# Altium PCB LPCB218R0.PcbDoc (part 2 of 3)
Units mm, origin at the board's own origin, x right, y up, seen from the top; angles counter-clockwise.
Board outline 259.35 x 183.7 mm, 4 copper layers (Top Layer, Internal Plane 1, Mid-Layer 1, Bottom Layer); 193 components, 208 nets, 896 pads, 205 vias.
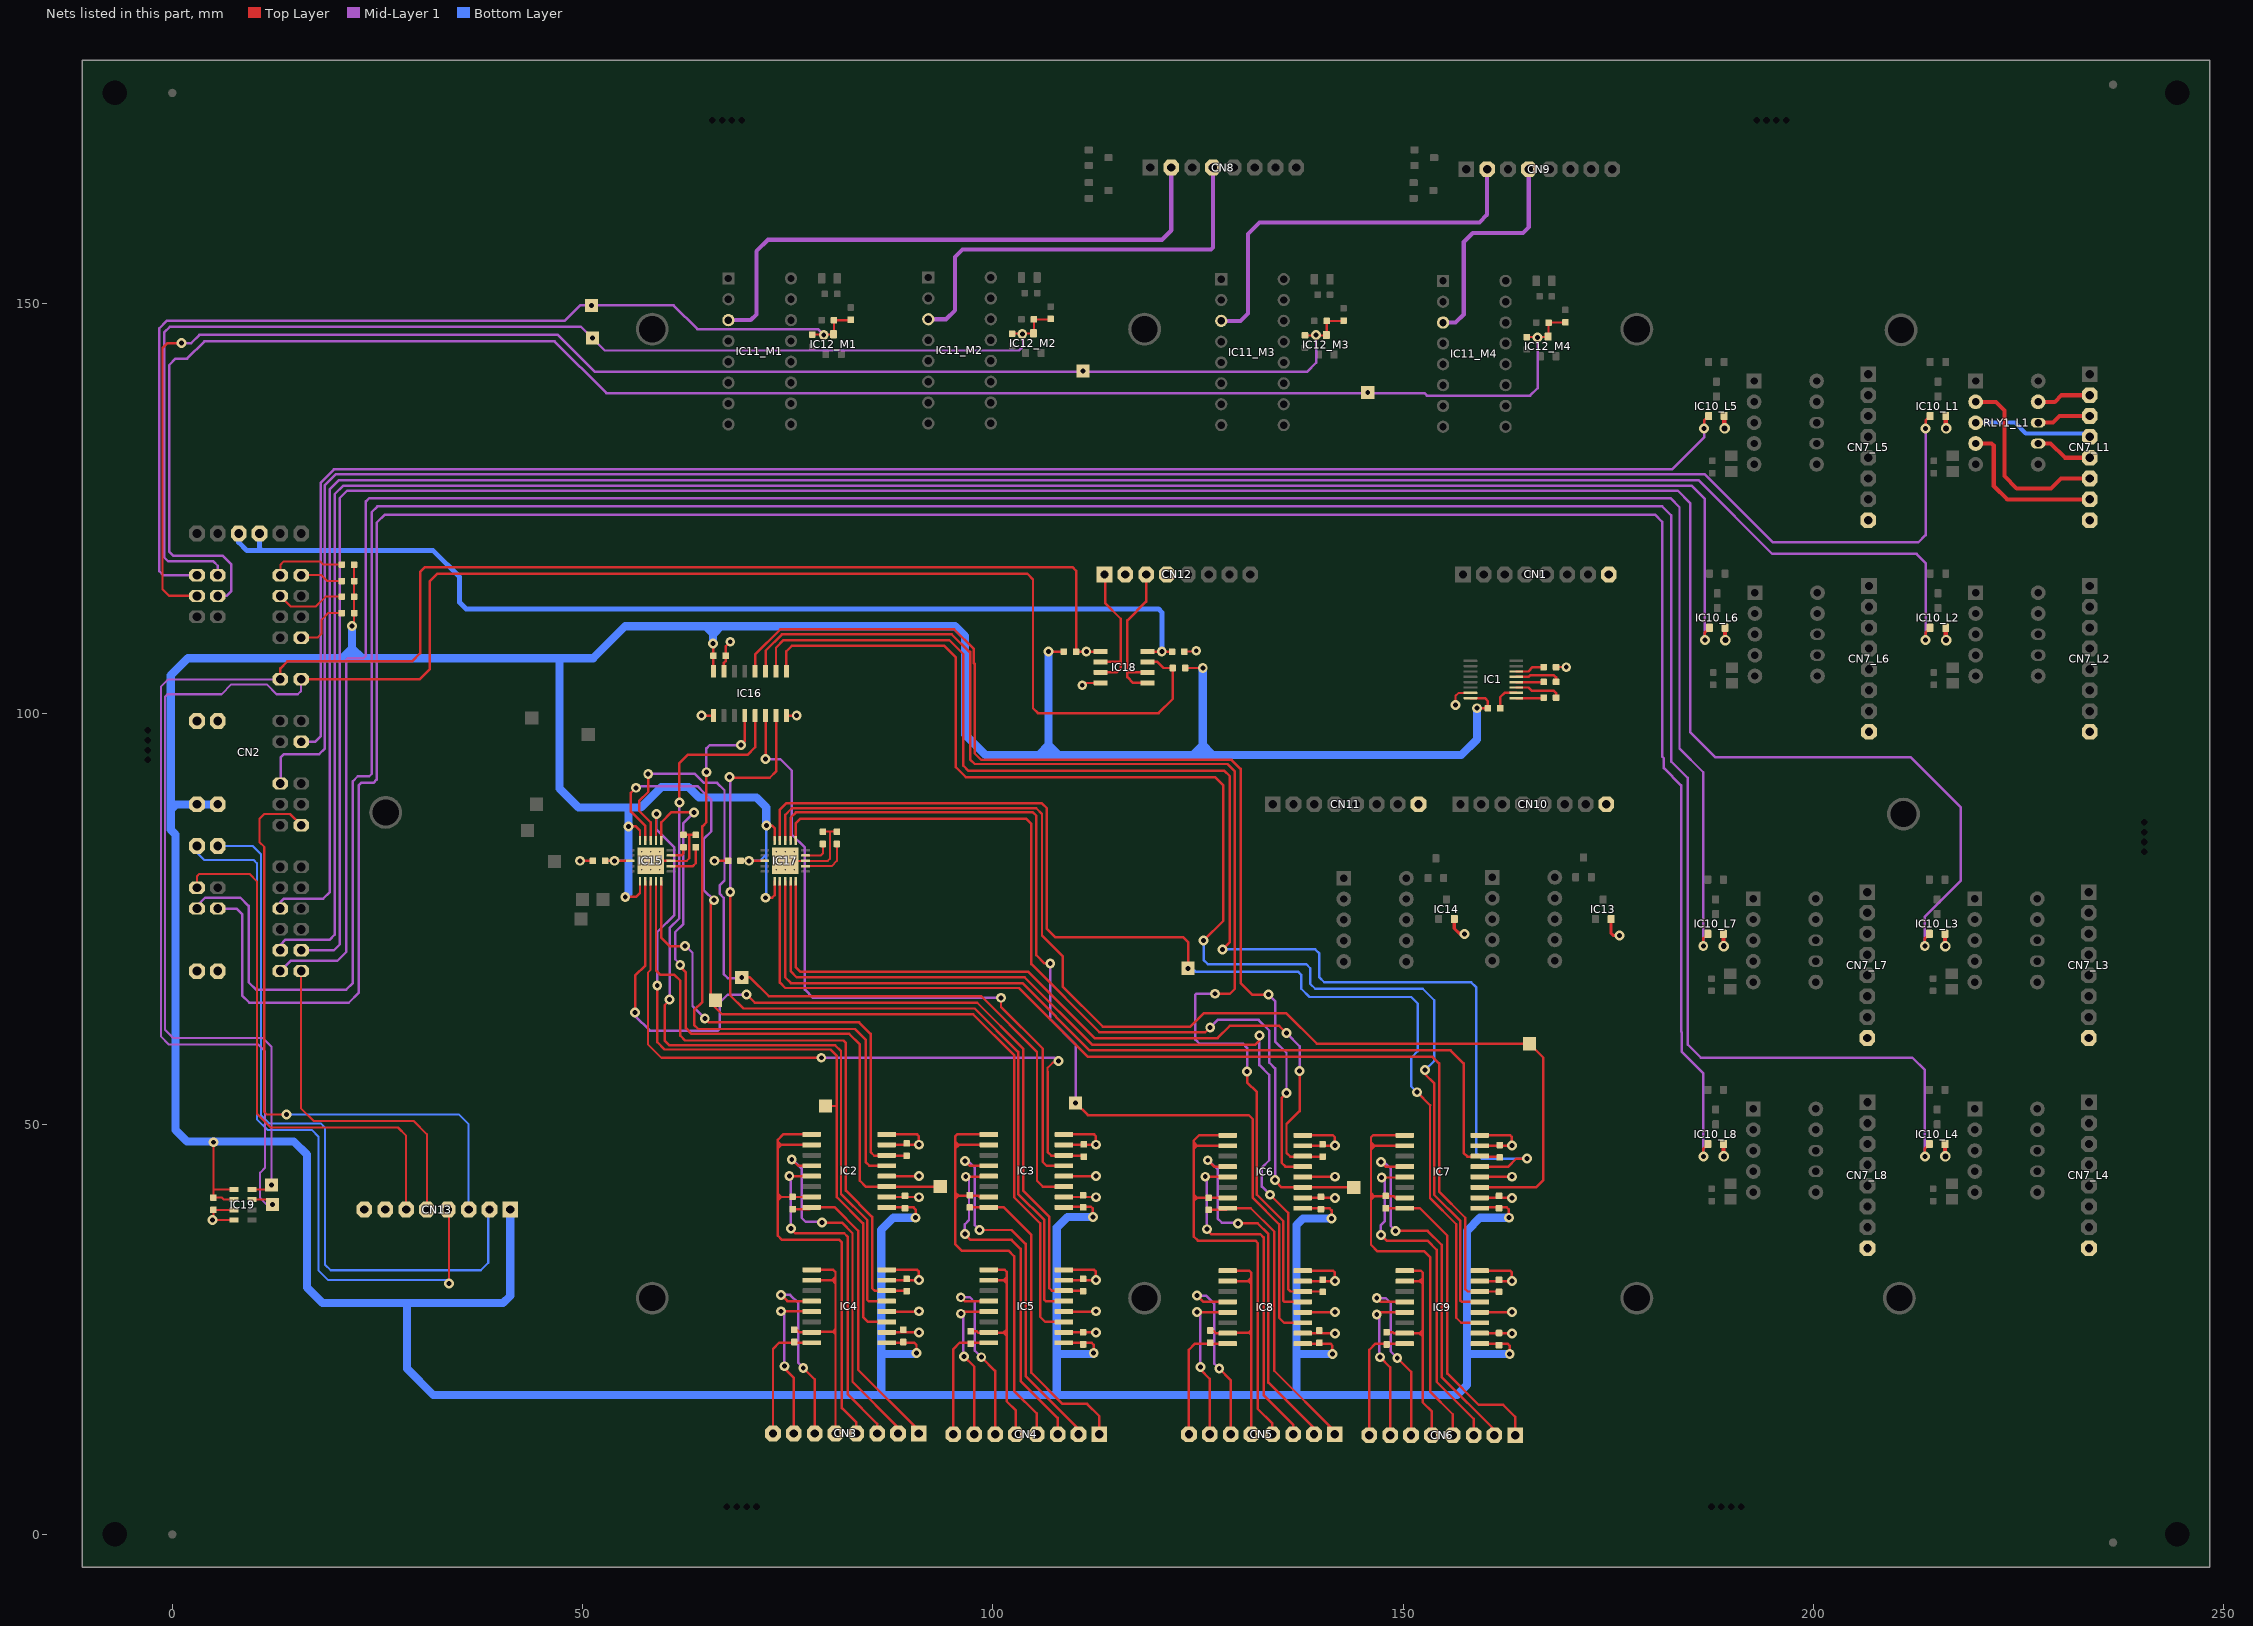
[diagram p4: the nets of this part, all layers, seen from the top]

## Via types
v1: diameter 1.2, hole 0.6, Top Layer to Bottom Layer, 181 vias
v2: diameter 0.5, hole 0.2, Top Layer to Bottom Layer, tented both sides, 16 vias
v3: diameter 1.27, hole 0.711, Top Layer to Bottom Layer, 8 vias

## Nets (pads, with @x,y where several pads share a name; then routed paths per layer and width w, separated by ;. In a path a pad name is that pad's centre, name@x,y a point inside that pad or via, vN(x,y) a via of type N, cw(c..) or ccw(c..) an arc to the next point about the centre after c; other vN are vias at no path point) (continued)
D3V3A: C1.1 C5.1 C6.1 C9.1 C10.1 C13.1 C14.1 C17.1 C18.1 C24.1 C25.1 C28.1 C31.1 CN2.D3V31 CN2.D3V32 CN13.1 IC1.16 IC2.1 IC3.1 IC4.1 IC5.1 IC6.1 IC7.1 IC8.1 IC9.1 IC15.10 IC15.13 IC15.16 IC16.16 IC17.10 IC17.13 IC17.16 IC19.1 IC19.2 R1.2 R2.2 R3.2 R4.2 R15.2 R16.2 | length 768
  Top Layer w0.254: v1(5,47.8) 5,42 ; IC19.2@7.5,40.8 6.3,40.8 6.05,41.05 C31.1@5,41.05 5,42 ; IC19.1@7.5,42.05 5.05,42.05 5,42 ; v1(21.9,110.7) 22.15,110.95 R1.2@22.15,112.3 R2.2@22.15,114.3 R3.2@22.15,116.2 R4.2@22.15,118.2
  Top Layer w0.3: C25.1@52.75,82.1 v1(53.9,82.1) IC15.13@55.825,82.1 ; v1@55.05,77.55 v1(55.2,77.7) 56.5,77.7 57,78.2 IC15.16@57,79.625 ; v1(55.6,86.3) 56.5,86.3 57,85.8 IC15.10@57,84.575 ; v1(65.9,108.6) 65.955,108.545 IC16.16@65.955,105.2 ; C28.1@69.15,82.1 C28.1@69.25,82.1 v1(70.3,82.1) IC17.13@72.225,82.1 ; v1(72.3,77.6) 73.1,77.6 73.4,77.9 IC17.16@73.4,79.625 ; v1(72.4,86.4) 73.1,86.4 73.4,86.1 IC17.10@73.4,84.575 ; IC2.1@87.075,39.855 90.345,39.855 90.6,39.6 v1(90.6,38.6) ; IC4.1@87.175,23.355 90.445,23.355 90.7,23.1 v1(90.7,22.1) ; v1(106.8,107.6) R16.2@108.65,107.6 ; IC3.1@108.675,39.955 111.945,39.955 112.2,39.7 v1(112.2,38.7) ; IC5.1@108.775,23.355 112.045,23.355 112.3,23.1 v1(112.3,22.1) ; R15.2@123.45,105.6 v1(125.6,105.6) ; IC6.1@137.775,39.755 141.045,39.755 141.3,39.5 v1(141.3,38.5) ; IC8.1@137.875,23.255 141.145,23.255 141.4,23 v1(141.4,22) ; IC1.16@158.225,101.925 159.975,101.925 160.35,101.55 C1.1@160.35,100.7 v1(159,100.7) ; IC7.1@159.375,39.855 162.645,39.855 162.9,39.6 v1(162.9,38.6) ; IC9.1@159.475,23.255 162.745,23.255 163,23 v1(163,22)
  Bottom Layer w0.3: v1(53.9,82.1) 55.6,82.1 ; v1(70.3,82.1) 71.6,82.1 72.4,82.9 ; v1(72.3,77.6) 72.4,77.7 72.4,82.9 ; v1(72.4,86.4) 72.4,82.9
  Bottom Layer w1: CN2.D3V32@5.54,88.98 CN2.D3V31@3,88.98 0.48,88.98 -0.2,88.3 ; v1(21.9,110.7) 21.9,108 ; CN13.1@41.19,39.6 41.19,29.09 40.3,28.2 28.6,28.2 ; v1(55.2,77.7) 55.6,78.1 55.6,82.1 v1(55.6,86.3) 55.6,88.6 ; v1(65.9,108.6) 65.9,109.8 ; v1(72.4,86.4) 72.4,88.6 71.2,89.8 64.2,89.8 62.9,91.1 59.6,91.1 57.1,88.6 55.6,88.6 ; v1(90.6,38.6) 87.9,38.6 86.4,37.1 86.4,22 ; v1(90.7,22.1) 90.6,22 86.4,22 ; v1(106.8,107.6) 106.8,96.2 ; 108.1,95 108,95 ; v1(112.2,38.7) 109.1,38.7 107.8,37.4 107.8,22 ; v1(112.3,22.1) 112.2,22 107.8,22 ; v1(125.6,105.6) 125.6,96.2 ; v1(141.3,38.5) 137.8,38.5 137,37.7 137,22 ; v1(141.4,22) 137,22 ; v1(159,100.7) 159,96.9 157.1,95 126.6,95 ; v1(162.9,38.6) 159.4,38.6 157.8,37 157.8,22 ; v1(163,22) 157.8,22 ; -0.2,88.3 -0.2,104.7 1.9,106.8 20.9,106.8 ; -0.2,88.3 -0.2,85.9 0.4,85.3 0.4,49.3 1.8,47.9 14.8,47.9 16.4,46.3 16.4,30.1 18.3,28.2 28.6,28.2 ; 20.9,106.8 21.9,106.8 ; 20.9,106.8 20.9,107 21.9,108 ; 21.9,106.8 23.1,106.8 ; 21.9,106.8 21.9,108 ; 21.9,108 23.1,106.8 ; 23.1,106.8 47.2,106.8 ; 28.6,28.2 28.6,20.2 31.8,17 86.4,17 ; 47.2,106.8 51.3,106.8 55.2,110.7 65,110.7 ; 47.2,106.8 47.2,90.9 49.5,88.6 55.6,88.6 ; 65,110.7 65.9,110.7 ; 65,110.7 65.9,109.8 ; 65.9,109.8 66,109.8 66.9,110.7 ; 65.9,109.8 65.9,110.7 ; 65.9,110.7 66.9,110.7 ; 66.9,110.7 95.4,110.7 96.6,109.5 96.6,97.5 99.1,95 105.6,95 ; 86.4,17 86.4,22 ; 86.4,17 107.8,17 ; 105.6,95 106.8,95 ; 105.6,95 106.8,96.2 ; 106.8,95 108,95 ; 106.8,95 106.8,96.2 ; 106.8,96.2 108,95 ; 107.8,17 137,17 ; 107.8,17 107.8,22 ; 108,95 124.4,95 ; 124.4,95 125.6,95 ; 124.4,95 125.6,96.2 ; 125.6,95 126.6,95 ; 125.6,95 125.6,96.2 ; 125.6,96.2 126.6,95.2 126.6,95 ; 137,17 137,22 ; 137,17 156.6,17 157.8,18.2 157.8,22
D12VA: C32.1 CN2.D12V1 CN2.D12V2 IC18.8 | length 129
  Top Layer w0.3: IC18.8@118.85,107.605 121.845,107.605 C32.1@121.85,107.6
  Bottom Layer w0.6: CN2.D12V2@8.08,122 8.08,120.92 9.1,119.9 10.9,119.9 ; CN2.D12V1@10.62,122 10.62,120.18 10.9,119.9 ; v1(120.6,107.6) 120.6,112.4 120.2,112.8 35.8,112.8 35,113.6 35,116.7 31.8,119.9 10.9,119.9
DGND: C4.2 C5.2 C6.2 C9.2 C10.2 C13.2 C14.2 C17.2 C18.2 C24.2 C25.2 C26.2 C27.2 C28.2 C29.2 C30.2 C31.2 C32.2 CN1.8 CN2.GND1 CN2.GND2 CN2.GND3 CN2.GND4 CN7_L1.8 CN7_L2.8 CN7_L3.8 CN7_L4.8 CN7_L5.8 CN7_L6.8 CN7_L7.8 CN7_L8.8 CN10.8 CN11.8 CN12.2 CN12.4 CN13.7 CN13.8 IC1.15 IC2.2 IC2.4 IC2.7 IC2.8 IC3.2 IC3.4 IC3.7 IC3.8 IC4.2 IC4.4 IC4.7 IC4.8 IC5.2 IC5.4 IC5.7 IC5.8 IC6.2 IC6.4 IC6.7 IC6.8 IC7.2 IC7.4 IC7.7 IC7.8 IC8.2 IC8.4 IC8.7 IC8.8 IC9.2 IC9.4 IC9.7 IC9.8 IC10_L1.2 IC10_L2.2 IC10_L3.2 IC10_L4.2 IC10_L5.2 IC10_L6.2 IC10_L7.2 IC10_L8.2 IC13.2 IC14.2 IC15.3 IC15.PAD IC16.1 IC16.8 IC16.15 IC17.3 IC17.PAD IC18.4 IC19.3 IC19.4 R5.1 R6.1 R7.1 R8.1 R9.1 R10.1 R11.1 R12.1 | length 195.9
  Top Layer w0.254: IC19.4@7.5,38.3 5.2,38.3 5,38.5 C31.2@5,39.55 IC19.3@7.5,39.55 ; IC15.3@60.775,82.1 62.7,82.1 63,82.4 63,85.25 ; IC17.PAD@74.7,82.1 v2(75.8,82.1) IC17.3@77.175,82.1 79.9,82.1 80.15,82.35 80.15,85.65 ; C30.2@79.3,85.65 80.15,85.65 ; C29.2@81,85.65 80.15,85.65 ; v1(110.9,103.5) 111.195,103.795 IC18.4@113.15,103.795 ; C32.2@123.35,107.6 124.7,107.6 v1(124.8,107.7) ; v1(156.4,101.1) 156.4,102.2 156.775,102.575 IC1.15@158.225,102.575 ; C4.2@168.65,105.7 v1(169.9,105.7)
  Top Layer w0.3: v1(49.7,82.1) C25.2@51.25,82.1 ; IC15.PAD@58.3,82.1 v2(59.4,82.1) IC15.3@60.775,82.1 ; C27.2@62.3,85.25 63,85.25 C26.2@63.8,85.25 ; v1(64.5,99.8) IC16.1@65.955,99.8 ; v1(66.1,82.1) C28.2@67.65,82.1 ; IC16.15@67.225,105.2 67.225,106.225 67.45,106.45 C24.2@67.45,107.1 67.45,108.25 v1(68,108.8) ; IC16.8@74.845,99.8 v1(76.1,99.8) ; IC4.2@87.075,24.625 v1@90.985,24.625 ; IC4.4@87.075,27.165 v1@90.975,27.165 ; IC4.7@87.075,30.975 90.985,30.975 90.985,32.025 90.765,32.245 IC4.8@87.075,32.245 ; IC2.2@87.075,41.125 v1@90.985,41.125 ; IC2.4@87.075,43.665 v1@90.975,43.665 ; IC2.7@87.075,47.475 90.985,47.475 90.985,48.525 90.765,48.745 IC2.8@87.075,48.745 ; IC5.2@108.665,24.625 112.575,24.625 v1(112.6,24.6) ; IC5.4@108.665,27.165 112.565,27.165 v1(112.6,27.2) ; IC5.7@108.665,30.975 v1@112.575,30.975 ; IC5.8@108.665,32.245 112.355,32.245 112.575,32.025 v1@112.575,30.975 ; IC3.2@108.665,41.125 v1@112.575,41.125 ; IC3.4@108.665,43.665 v1@112.565,43.665 ; IC3.7@108.665,47.475 112.575,47.475 112.575,48.525 112.355,48.745 IC3.8@108.665,48.745 ; v1(112.6,31) v1@112.575,30.975 ; IC8.2@137.775,24.525 v1@141.685,24.525 ; IC8.4@137.775,27.065 v1@141.675,27.065 ; IC8.7@137.775,30.875 141.685,30.875 141.685,31.925 141.465,32.145 IC8.8@137.775,32.145 ; IC6.2@137.775,41.025 v1@141.685,41.025 ; IC6.4@137.775,43.565 v1@141.675,43.565 ; IC6.7@137.775,47.375 141.685,47.375 141.685,48.425 141.465,48.645 IC6.8@137.775,48.645 ; IC9.2@159.365,24.525 163.275,24.525 v1(163.3,24.5) ; IC9.4@159.365,27.065 163.265,27.065 v1(163.3,27.1) ; IC9.7@159.365,30.875 v1@163.275,30.875 ; IC9.8@159.365,32.145 163.055,32.145 163.275,31.925 v1@163.275,30.875 ; IC7.2@159.365,41.025 v1@163.275,41.025 ; IC7.4@159.365,43.565 v1@163.265,43.565 ; IC7.7@159.365,47.375 163.275,47.375 163.275,48.425 163.055,48.645 IC7.8@159.365,48.645 ; v1(163.3,30.9) v1@163.275,30.875
  Top Layer w0.4: IC14.2@156.25,75 156.25,73.85 156.9,73.2 v1(157.5,73.2) ; IC13.2@175.35,75 175.35,73.25 175.6,73 v1(176.4,73)
  Top Layer w0.5: IC10_L7.2@189.05,73.2 189.05,71.75 v3(189.1,71.7) ; IC10_L8.2@189.06,47.58 189.06,46.13 v3(189.11,46.08) ; IC10_L5.2@189.15,136.3 189.15,134.85 v3(189.2,134.8) ; IC10_L6.2@189.25,110.5 189.25,109.05 v3(189.3,109) ; IC10_L3.2@216.05,73.2 216.05,71.75 v3(216.1,71.7) ; IC10_L4.2@216.06,47.58 216.06,46.13 v3(216.11,46.08) ; IC10_L2.2@216.15,110.5 216.15,109.05 v3(216.2,109) ; IC10_L1.2@216.15,136.3 216.15,134.85 v3(216.2,134.8)
  other v1: 141.71,24.5 91.01,24.6 141.71,27.1 91.01,27.2 141.71,30.9 91.01,31 4.9,38.3 141.71,41 163.3,41 91.01,41.1 112.6,41.1 141.71,43.6 163.3,43.6 91.01,43.7 112.6,43.7 141.71,47.4 163.3,47.4 91.01,47.5 112.6,47.5
  other v2: 57.2,81 58.3,81 59.4,81 73.6,81 74.7,81 75.8,81 57.2,82.1 73.6,82.1 57.2,83.2 58.3,83.2 59.4,83.2 73.6,83.2 74.7,83.2 75.8,83.2
EXPAND_MOSI: CN2.T11 CN13.3 | length 77.8
  Top Layer w0.254: v1(13.9,51.2) 11.5,51.2 11.2,51.5 11.2,83.8 10.6,84.4 10.6,87.2 11.2,87.8 14.34,87.8 CN2.T11@15.7,86.44
  Bottom Layer w0.254: v1(13.9,51.2) 34.9,51.2 36.11,49.99 CN13.3@36.11,39.6
EXPAND_NCS: CN2.T28 CN13.6 | length 65.8
  Top Layer w0.254: CN2.T28@3,78.82 3,80.2 3.3,80.5 9.4,80.5 10.3,79.6 10.3,51.3 12,49.6 27.5,49.6 28.49,48.61 CN13.6@28.49,39.6
EXPAND_NRESET: CN2.T27 CN13.5 | length 42.6
  Top Layer w0.254: CN2.T27@15.7,68.66 15.7,51.9 17.2,50.4 29.4,50.4 31.03,48.77 CN13.5@31.03,39.6
EXPAND_SCK: CN2.T13 CN13.2 | length 89.8
  Bottom Layer w0.254: CN2.T13@5.54,83.9 9.8,83.9 10.8,82.9 10.8,51.1 11.8,50.1 18.1,50.1 18.6,49.6 18.6,32.9 19.3,32.2 37.6,32.2 38.5,33.1 ; 38.5,33.2 38.5,33.1 ; CN13.2@38.65,39.6 38.5,39.45 38.5,33.1
EXPAND_SOMI: CN2.T12 CN13.4 | length 90.2
  Top Layer w0.254: CN13.4@33.57,39.6 33.7,39.47 v1(33.7,30.6)
  Bottom Layer w0.254: CN2.T12@3,83.9 3,83.1 3.9,82.2 9.9,82.2 10.3,81.8 10.3,50.6 11.6,49.3 17,49.3 17.8,48.5 17.8,32.2 19,31 33.4,31 33.7,30.7 v1(33.7,30.6)
EXTERNAL_SCL_12V: CN12.3 IC18.5 IC18.6 | length 18.7
  Top Layer w0.3: CN12.3@118.69,117 118.69,113.69 116.4,111.4 116.4,105 ; IC18.5@118.85,103.795 117.105,103.795 116.4,104.5 116.4,105 ; IC18.6@118.85,105.065 116.465,105.065 116.4,105
EXTERNAL_SDA_12V: CN12.1 IC18.2 IC18.3 | length 17.4
  Top Layer w0.3: IC18.3@113.15,105.065 115.065,105.065 115.6,105.6 115.6,106.5 ; IC18.2@113.15,106.335 115.435,106.335 115.6,106.5 ; CN12.1@113.61,117 113.7,116.91 113.7,113.5 115.6,111.6 115.6,106.5
HEC1_5V: C7.1 CN3.1 IC2.16 | length 37
  Top Layer w0.3: C7.1@75.6,39.65 77.72,39.65 IC2.16@77.925,39.855 80.745,39.855 83.6,37 83.6,20.051 90.99,12.661 CN3.1@90.99,12.3
HEC1_GND: C7.2 CN3.4 IC2.9 IC2.10 IC2.15 | length 58.8
  Top Layer w0.3: IC2.15@77.925,41.125 74.2,41.125 ; IC2.10@77.925,47.475 74.2,47.475 ; IC2.9@77.925,48.745 74.445,48.745 73.8,48.1 73.8,47.8 ; CN3.4@83.37,12.3 83.37,13.63 81.6,15.4 81.6,35.6 81.3,35.9 74.3,35.9 73.8,36.4 73.8,40.725 ; 73.8,40.725 74.2,41.125 ; 73.8,40.725 73.8,41.2 ; 73.8,41.2 73.875,41.125 74.2,41.125 ; 73.8,41.2 73.8,41.525 ; 73.8,41.525 74.2,41.125 ; 73.8,41.525 73.8,47.1 ; 73.8,47.1 73.825,47.1 74.2,47.475 ; 73.8,47.1 73.8,47.5 ; 73.8,47.5 73.825,47.475 74.2,47.475 ; 73.8,47.5 73.8,47.8 ; 73.8,47.8 73.875,47.8 74.2,47.475
HEC1_RS485_A: CN3.2 IC2.12 | length 44.1
  Top Layer w0.3: v1(75.5,45.7) 76.265,44.935 IC2.12@77.925,44.935 ; v1(79.2,38) 81.6,38 82.9,36.7 82.9,18.6 88.45,13.05 CN3.2@88.45,12.3
  Mid-Layer 1 w0.3: v1(75.5,45.7) 75.6,45.7 76.7,44.6 76.7,38.6 77.2,38.1 79.1,38.1 v1(79.2,38)
HEC1_RS485_B: CN3.3 IC2.13 | length 42.5
  Top Layer w0.3: v1(75.2,43.7) 75.235,43.665 IC2.13@77.925,43.665 ; v1(75.4,37.3) 75.3,37.3 75.9,36.7 81.9,36.7 82.3,36.3 82.3,17.1 85.91,13.49 CN3.3@85.91,12.3
  Mid-Layer 1 w0.3: v1(75.2,43.7) 75,43.7 75.4,43.3 v1(75.4,37.3)
HEC2_5V: C11.1 CN3.8 IC4.16 | length 15.3
  Top Layer w0.3: CN3.8@73.21,12.3 73.21,22.61 73.955,23.355 IC4.16@77.925,23.355
HEC2_GND: C11.2 CN3.5 IC4.9 IC4.10 IC4.15 | length 32.8
  Top Layer w0.3: C11.2@75.8,24.95 76.15,24.95 76.475,24.625 IC4.15@77.925,24.625 78,24.7 80.5,24.7 ; IC4.10@77.925,30.975 80.405,30.975 ; IC4.9@77.925,32.245 80.555,32.245 80.83,31.97 80.83,31.4 ; CN3.5@80.83,12.3 80.83,24.4 ; 80.405,30.975 80.83,31.4 ; 80.405,30.975 80.455,30.975 ; 80.455,30.975 80.83,30.6 ; 80.455,30.975 80.755,30.975 80.83,30.9 ; 80.5,24.7 80.83,25.03 ; 80.5,24.7 80.53,24.7 ; 80.53,24.7 80.83,24.4 ; 80.53,24.7 80.83,24.7 ; 80.83,24.4 80.83,24.7 ; 80.83,24.7 80.83,25.03 ; 80.83,25.03 80.83,30.6 ; 80.83,30.6 80.83,30.9 ; 80.83,30.9 80.83,31.4
HEC2_RS485_A: CN3.6 IC4.12 | length 23.3
  Top Layer w0.3: v1(74.2,29.2) 74.965,28.435 IC4.12@77.925,28.435 ; v1(76.9,20.3) 78.29,18.91 CN3.6@78.29,12.3
  Mid-Layer 1 w0.3: v1(74.2,29.2) 75.3,29.2 76.3,28.2 76.3,20.9 v1(76.9,20.3)
HEC2_RS485_B: CN3.7 IC4.13 | length 19.3
  Top Layer w0.3: v1(74.2,27.2) 77.89,27.2 IC4.13@77.925,27.165 ; v1(74.6,20.5) 74.6,20.2 75.75,19.05 CN3.7@75.75,12.3
  Mid-Layer 1 w0.3: v1(74.2,27.2) 74.6,26.8 v1(74.6,20.5)
HEC3_5V: C8.1 CN4.1 IC3.16 | length 38.4
  Top Layer w0.3: C8.1@97.2,39.85 101.35,39.85 104.7,36.5 104.7,19.7 108.5,15.9 111.5,15.9 112.98,14.42 CN4.1@112.98,12.2
HEC3_GND: C8.2 CN4.4 IC3.9 IC3.10 IC3.15 | length 58.7
  Top Layer w0.3: IC3.15@99.515,41.125 98.375,41.125 98.2,41.3 95.8,41.3 ; IC3.10@99.515,47.475 95.875,47.475 ; IC3.9@99.515,48.745 95.645,48.745 95.4,48.5 95.4,47.9 ; CN4.4@105.36,12.2 105.36,14.74 102.6,17.5 102.6,33.9 101.9,34.6 96.2,34.6 95.4,35.4 95.4,40.9 ; 95.4,40.9 95.8,41.3 ; 95.4,40.9 95.4,41.3 ; 95.4,41.3 95.8,41.3 ; 95.4,41.3 95.4,41.7 ; 95.4,41.7 95.8,41.3 ; 95.4,41.7 95.4,47 ; 95.4,47 95.875,47.475 ; 95.4,47 95.4,47.6 ; 95.4,47.6 95.525,47.475 95.825,47.475 ; 95.4,47.6 95.4,47.9 ; 95.4,47.9 95.825,47.475 ; 95.825,47.475 95.875,47.475
HEC3_RS485_A: CN4.2 IC3.12 | length 44.7
  Top Layer w0.3: v1(96.6,45.5) 97.165,44.935 IC3.12@99.515,44.935 ; v1(98.4,37.1) 102.3,37.1 104,35.4 104,19.3 110.44,12.86 CN4.2@110.44,12.2
  Mid-Layer 1 w0.3: v1(96.6,45.5) 97,45.5 97.8,44.7 97.8,37.7 v1(98.4,37.1)
HEC3_RS485_B: CN4.3 IC3.13 | length 42.2
  Top Layer w0.3: v1(96.6,36.6) 97.3,35.9 102.3,35.9 103.4,34.8 103.4,18.7 107.9,14.2 CN4.3@107.9,12.2 ; v1(96.7,43.6) 99.45,43.6 IC3.13@99.515,43.665
  Mid-Layer 1 w0.3: v1(96.6,36.6) 96.6,37.8 97.1,38.3 97.1,43.2 v1(96.7,43.6)
HEC4_5V: C12.1 CN4.8 IC5.16 | length 15
  Top Layer w0.3: CN4.8@95.2,12.2 95.2,22.6 95.955,23.355 IC5.16@99.515,23.355
HEC4_GND: C12.2 CN4.5 IC5.9 IC5.10 IC5.15 | length 31.5
  Top Layer w0.3: C12.2@97.3,24.75 98.05,24.75 98.2,24.6 101.3,24.6 ; IC5.10@99.515,30.975 101.3,30.975 ; IC5.9@99.515,32.245 101.455,32.245 101.7,32 101.7,31.375 ; 101.675,30.925 101.675,30.975 101.325,30.975 ; 101.7,31.4 101.7,31.375 ; CN4.5@102.82,12.2 102.82,15.08 101.7,16.2 101.7,24.2 ; 101.3,24.6 101.7,25 ; 101.3,24.6 101.7,24.6 ; 101.3,24.6 101.7,24.2 ; 101.3,30.975 101.7,31.375 ; 101.3,30.975 101.325,30.975 ; 101.325,30.975 101.7,30.6 ; 101.7,24.2 101.7,24.6 ; 101.7,24.6 101.7,25 ; 101.7,25 101.7,30.6 ; 101.7,30.6 101.7,31.375
HEC4_RS485_A: CN4.6 IC5.12 | length 22.7
  Top Layer w0.3: v1(96.1,28.9) 96.565,28.435 IC5.12@99.515,28.435 ; v1(98.6,21.6) 100.28,19.92 CN4.6@100.28,12.2
  Mid-Layer 1 w0.3: v1(96.1,28.9) 97.2,28.9 97.8,28.3 97.8,22.4 v1(98.6,21.6)
HEC4_RS485_B: CN4.7 IC5.13 | length 18.9
  Top Layer w0.3: v1(96.1,26.9) 96.365,27.165 IC5.13@99.515,27.165 ; v1(96.5,21.7) 97.74,20.46 CN4.7@97.74,12.2
  Mid-Layer 1 w0.3: v1(96.1,26.9) 96.4,26.6 96.4,21.8 v1(96.5,21.7)
HEC5_5V: C15.1 CN5.1 IC6.16 | length 37
  Top Layer w0.3: C15.1@126.3,39.55 128.42,39.55 IC6.16@128.625,39.755 131.445,39.755 134.3,36.9 134.3,19.951 141.69,12.561 CN5.1@141.69,12.2
HEC5_GND: C15.2 CN5.4 IC6.9 IC6.10 IC6.15 | length 58.8
  Top Layer w0.3: IC6.15@128.625,41.025 124.9,41.025 ; IC6.10@128.625,47.375 124.9,47.375 ; IC6.9@128.625,48.645 125.145,48.645 124.5,48 124.5,47.7 ; CN5.4@134.07,12.2 134.07,13.53 132.3,15.3 132.3,35.5 132,35.8 125,35.8 124.5,36.3 124.5,40.625 ; 124.5,40.625 124.5,41.1 ; 124.5,40.625 124.9,41.025 ; 124.5,41.1 124.5,41.425 ; 124.5,41.1 124.575,41.025 124.9,41.025 ; 124.5,41.425 124.5,47 ; 124.5,41.425 124.9,41.025 ; 124.5,47 124.5,47.4 ; 124.5,47 124.525,47 124.9,47.375 ; 124.5,47.4 124.5,47.7 ; 124.5,47.4 124.525,47.375 124.9,47.375 ; 124.5,47.7 124.575,47.7 124.9,47.375
HEC6_5V: C19.1 CN5.8 IC8.16 | length 15.3
  Top Layer w0.3: CN5.8@123.91,12.2 123.91,22.51 124.655,23.255 IC8.16@128.625,23.255
HEC6_GND: C19.2 CN5.5 IC8.9 IC8.10 IC8.15 | length 32.8
  Top Layer w0.3: C19.2@126.5,24.85 126.85,24.85 127.175,24.525 IC8.15@128.625,24.525 128.7,24.6 131.2,24.6 ; IC8.10@128.625,30.875 131.105,30.875 ; IC8.9@128.625,32.145 131.255,32.145 131.53,31.87 131.53,31.3 ; CN5.5@131.53,12.2 131.53,24.3 ; 131.105,30.875 131.155,30.875 ; 131.105,30.875 131.53,31.3 ; 131.155,30.875 131.53,30.5 ; 131.155,30.875 131.455,30.875 131.53,30.8 ; 131.2,24.6 131.23,24.6 ; 131.2,24.6 131.53,24.93 ; 131.23,24.6 131.53,24.3 ; 131.23,24.6 131.53,24.6 ; 131.53,24.3 131.53,24.6 ; 131.53,24.6 131.53,24.93 ; 131.53,24.93 131.53,30.5 ; 131.53,30.5 131.53,30.8 ; 131.53,30.8 131.53,31.3
HEC7_5V: C16.1 CN6.1 IC7.16 | length 38.4
  Top Layer w0.3: C16.1@147.9,39.75 152.05,39.75 155.4,36.4 155.4,19.6 159.2,15.8 162.2,15.8 163.68,14.32 CN6.1@163.68,12.1
HEC7_GND: C16.2 CN6.4 IC7.9 IC7.10 IC7.15 | length 58.7
  Top Layer w0.3: IC7.15@150.215,41.025 149.075,41.025 148.9,41.2 146.5,41.2 ; IC7.10@150.215,47.375 146.575,47.375 ; IC7.9@150.215,48.645 146.345,48.645 146.1,48.4 146.1,47.8 ; CN6.4@156.06,12.1 156.06,14.64 153.3,17.4 153.3,33.8 152.6,34.5 146.9,34.5 146.1,35.3 146.1,40.8 ; 146.1,40.8 146.1,41.2 ; 146.1,40.8 146.5,41.2 ; 146.1,41.2 146.1,41.6 ; 146.1,41.2 146.5,41.2 ; 146.1,41.6 146.1,46.9 ; 146.1,41.6 146.5,41.2 ; 146.1,46.9 146.1,47.5 ; 146.1,46.9 146.575,47.375 ; 146.1,47.5 146.225,47.375 146.525,47.375 ; 146.1,47.5 146.1,47.8 ; 146.1,47.8 146.525,47.375 ; 146.525,47.375 146.575,47.375
HEC8_5V: C20.1 CN6.8 IC9.16 | length 15
  Top Layer w0.3: CN6.8@145.9,12.1 145.9,22.5 146.655,23.255 IC9.16@150.215,23.255
HEC8_GND: C20.2 CN6.5 IC9.9 IC9.10 IC9.15 | length 31.5
  Top Layer w0.3: C20.2@148,24.65 148.75,24.65 148.9,24.5 152,24.5 ; IC9.10@150.215,30.875 152,30.875 ; IC9.9@150.215,32.145 152.155,32.145 152.4,31.9 152.4,31.275 ; 152.375,30.825 152.375,30.875 152.025,30.875 ; 152.4,31.3 152.4,31.275 ; CN6.5@153.52,12.1 153.52,14.98 152.4,16.1 152.4,24.1 ; 152,24.5 152.4,24.1 ; 152,24.5 152.4,24.9 ; 152,24.5 152.4,24.5 ; 152,30.875 152.025,30.875 ; 152,30.875 152.4,31.275 ; 152.025,30.875 152.4,30.5 ; 152.4,24.1 152.4,24.5 ; 152.4,24.5 152.4,24.9 ; 152.4,24.9 152.4,30.5 ; 152.4,30.5 152.4,31.275
HEC_D1: IC2.6 IC15.20 R5.2 | length 60.1
  Top Layer w0.3: IC15.20@59.6,79.625 59.6,72.7 60.6,71.7 v1(62.5,71.7) ; v1(64.9,62.9) 65.4,62.4 83.7,62.4 85.1,61 85.1,46.6 85.55,46.15 R5.2@89.5,46.15
  Mid-Layer 1 w0.3: v1(62.5,71.7) 62.6,71.7 63.4,70.9 63.4,64.4 v1(64.9,62.9)
HEC_D2: IC4.6 IC15.19 R7.2 | length 77.2
  Top Layer w0.3: IC15.19@58.95,79.625 58.95,68.75 59.5,68.2 61.2,68.2 61.9,67.5 61.9,60.8 62.5,60.2 81.8,60.2 82.1,59.9 82.1,41.9 85.3,38.7 85.3,30 85.595,29.705 IC4.6@87.075,29.705 R7.2@89.5,29.705
HEC_D3: IC3.6 IC15.18 R6.2 | length 87.4
  Top Layer w0.254: IC15.18@58.3,79.625 58.3,68.8 58,68.5 58,59.7 59.6,58.1 v1(79.1,58.1) ; 106.69,56.4 106.69,56.89 107.3,57.5 107.8,57.5 v1(108,57.7)
  Top Layer w0.3: 106.69,56.4 106.69,46.6 107.14,46.15 R6.2@111.09,46.15
  Mid-Layer 1 w0.254: v1(79.1,58.1) 107.6,58.1 v1(108,57.7)
HEC_D4: IC5.6 IC15.17 R8.2 | length 106.3
  Top Layer w0.3: v1(56.4,63.6) 56.4,68.1 57.65,69.35 IC15.17@57.65,79.625 ; v1(70,65.8) 71,64.8 98.1,64.8 103.69,59.21 103.69,41.9 106.89,38.7 106.89,30 107.185,29.705 IC5.6@108.665,29.705 R8.2@111.09,29.705
  Mid-Layer 1 w0.3: v1(56.4,63.6) 56.4,63.2 58.2,61.4 66.5,61.4 66.7,61.6 66.7,64.8 67.7,65.8 v1(70,65.8)
HEC_D5: IC6.6 IC17.20 R9.2 | length 95.4
  Top Layer w0.3: IC17.20@76,79.625 76,69.1 76.5,68.6 104.3,68.6 112.4,60.5 127.4,60.5 128.9,62 134.9,62 v1(135.8,61.1) ; v1(137.4,56.5) 137.4,51.6 135.8,50 135.8,46.5 136.25,46.05 R9.2@140.2,46.05
  Mid-Layer 1 w0.3: v1(135.8,61.1) 137.4,59.5 v1(137.4,56.5)
HEC_D6: IC8.6 IC17.19 R11.2 | length 110.1
  Top Layer w0.3: IC17.19@75.35,79.625 75.35,68.65 76.1,67.9 103.9,67.9 112.1,59.7 132,59.7 132.5,60.2 v1(132.5,60.8) ; v1(133.8,41.4) 136,39.2 136,29.9 136.295,29.605 IC8.6@137.775,29.605 R11.2@140.2,29.605
  Mid-Layer 1 w0.3: v1(132.5,60.8) 132.5,57.2 133.7,56 133.7,45.6 132.8,44.7 132.8,42.4 v1(133.8,41.4)
HEC_D7: IC7.6 IC17.18 R10.2 | length 114.3
  Top Layer w0.3: IC17.18@74.7,79.625 74.7,67.9 75.4,67.2 103.6,67.2 111.8,59 155.8,59 157.39,57.41 157.39,46.5 157.84,46.05 R10.2@161.79,46.05
HEC_D8: IC9.6 IC17.17 R12.2 | length 129.9
  Top Layer w0.3: IC17.17@74.05,79.625 74.05,67.25 74.7,66.6 103.2,66.6 111.6,58.2 153.6,58.2 154.39,57.41 154.39,41.8 157.59,38.6 157.59,29.9 157.885,29.605 IC9.6@159.365,29.605 R12.2@161.79,29.605
HEC_DE1: IC2.5 IC16.4 | length 81.8
  Top Layer w0.3: v1(65.1,92.9) 65.1,86.8 64.6,86.3 64.6,64.9 63.6,63.9 63.6,62.1 64.1,61.6 83.2,61.6 84.5,60.3 84.5,45.4 84.965,44.935 IC2.5@87.075,44.935 ; v1(69.3,96.2) 69.765,96.665 IC16.4@69.765,99.8
  Mid-Layer 1 w0.3: v1(65.1,92.9) 65.1,95.8 65.5,96.2 v1(69.3,96.2)
HEC_DE2: IC4.5 IC16.5 | length 104.6
  Top Layer w0.3: v1(60.6,65.2) 60.6,65.1 60,64.5 60,60.2 60.6,59.6 80.8,59.6 81.5,58.9 81.5,41.5 84.7,38.3 84.7,28.6 84.865,28.435 IC4.5@87.075,28.435 ; v1(61.8,89.2) 61.8,94 62.8,95 70.1,95 71.035,95.935 IC16.5@71.035,99.8
  Mid-Layer 1 w0.3: v1(60.6,65.2) 60.6,73.9 61.8,75.1 v1(61.8,89.2)
HEC_DE3: IC3.5 IC16.6 | length 85.6
  Top Layer w0.3: v1(72.3,94.5) 72.305,94.505 IC16.6@72.305,99.8 ; v1(101,65.4) 101,64.3 106.09,59.21 106.09,45.4 106.555,44.935 IC3.5@108.665,44.935
  Mid-Layer 1 w0.3: v1(72.3,94.5) 74.1,94.5 75.5,93.1 75.5,85.3 77.1,83.7 77.1,66.4 78.1,65.4 v1(101,65.4)
HEC_DE4: IC5.5 IC16.7 | length 111.3
  Top Layer w0.3: v1@67.989,92.221 72.821,92.221 73.6,93 73.6,99.775 IC16.7@73.575,99.8 ; v1(68,78.3) 68,65.7 69.6,64.1 97.8,64.1 103.09,58.81 103.09,41.5 106.29,38.3 106.29,28.6 106.455,28.435 IC5.5@108.665,28.435
  Mid-Layer 1 w0.3: v1(68,78.3) v1@68,92.3
  other v1: 67.9,92.3
HEC_DE5: IC6.5 IC16.12 | length 131.4
  Top Layer w0.3: IC16.12@71.035,105.2 71.035,107.235 74.1,110.3 95.3,110.3 97.7,107.9 97.7,106.2 97.8,106.1 97.8,95.2 98.6,94.4 129.1,94.4 130.2,93.3 130.2,67.2 131.6,65.8 v1(133.6,65.8) ; v1(135.8,53.8) 135.2,53.2 135.2,45.3 135.665,44.835 IC6.5@137.775,44.835
  Mid-Layer 1 w0.3: v1(133.6,65.8) 134.4,65 134.4,60.1 135.8,58.7 v1(135.8,53.8)
HEC_DE6: IC8.5 IC16.11 | length 154
  Top Layer w0.3: IC16.11@72.305,105.2 72.305,107.705 74.3,109.7 95,109.7 97.1,107.6 97.2,107.6 97.24,107.56 97.24,94.46 97.8,93.9 128.6,93.9 129.5,93 129.5,66.5 128.9,65.9 v1(127.1,65.9) ; v1(131,56.4) 131,55.1 132.2,53.9 132.2,41.4 135.4,38.2 135.4,28.5 135.565,28.335 IC8.5@137.775,28.335
  Mid-Layer 1 w0.3: v1(127.1,65.9) 124.8,65.9 124.7,65.8 124.7,60.3 125.2,59.8 130.5,59.8 131,59.3 v1(131,56.4)
HEC_DE7: IC7.5 IC16.10 | length 162.2
  Top Layer w0.3: IC16.10@73.575,105.2 73.575,108.075 74.5,109 94.7,109 96.4,107.3 96.4,93.7 97,93.1 128.2,93.1 128.9,92.4 128.9,72.2 v1(128,71.3) ; IC7.5@159.365,44.835 162.835,44.835 163.8,45.8 v1(165.1,45.8)
  Bottom Layer w0.3: v1(128,71.3) 139.3,71.3 139.8,70.8 139.8,67.9 140.4,67.3 158.3,67.3 158.9,66.7 158.9,46.5 159.6,45.8 v1(165.1,45.8)
HEC_DE8: IC9.5 IC16.9 | length 168.7
  Top Layer w0.3: IC16.9@74.845,105.2 74.845,107.645 75.5,108.3 94.1,108.3 95.5,106.9 95.5,93.5 96.7,92.3 127.1,92.3 128.1,91.3 128.1,74.8 v1(125.7,72.4) ; v1(152.7,56.6) 152.7,56.09 153.79,55 153.79,41.4 156.99,38.2 156.99,28.5 157.155,28.335 IC9.5@159.365,28.335
  Bottom Layer w0.3: v1(125.7,72.4) 125.7,70 126.2,69.5 138.2,69.5 138.7,69 138.7,67.1 139.3,66.5 152.4,66.5 153.8,65.1 153.8,57.7 ; v1(152.7,56.6) 153.8,57.7 ; 153.8,60.7 153.8,57.7
HEC_R1: IC2.3 IC15.6 TP5.1 | length 83.3
  Top Layer w0.3: IC15.6@59.6,84.575 59.6,86.8 60.8,88 v1(63.6,88) ; v1(61.9,69.4) 61.8,69.3 62.6,68.5 62.6,61.7 63.3,61 82.5,61 83.8,59.7 83.8,43.1 84.505,42.395 IC2.3@87.075,42.395 93.595,42.395 TP5.1@93.6,42.4
  Mid-Layer 1 w0.3: v1(61.9,69.4) 61.9,69.5 61.3,70.1 61.3,73.4 62.3,74.4 62.3,86.7 v1(63.6,88)
HEC_R2: IC4.3 IC15.7 TP7.1 | length 93.1
  Top Layer w0.254: IC15.7@58.95,84.575 58.95,87.75 v1(59,87.8) ; TP7.1@79.6,52.2 81,52.2
  Top Layer w0.3: v1(59.1,66.9) 59.1,60 60,59.1 80.2,59.1 81,58.3 81,52.2 81,41.1 84.2,37.9 84.2,26.5 84.805,25.895 IC4.3@87.075,25.895
  Mid-Layer 1 w0.3: v1(59,87.8) 59,85.9 61.2,83.7 61.2,75.5 59.1,73.4 v1(59.1,66.9)
HEC_R3: IC3.3 IC15.8 TP6.1 | length 103.6
  Top Layer w0.3: v1(58,92.7) 58,90.5 56.9,89.4 56.9,88.2 58.3,86.8 IC15.8@58.3,84.575 ; v1(69.4,67.9) 70.4,67.9 72.7,65.6 98.6,65.6 105.39,58.81 105.39,43.1 106.095,42.395 IC3.3@108.665,42.395
  Mid-Layer 1 w0.3: v1(58,92.7) 63.7,92.7 64.8,91.6 66.4,91.6 67.3,90.7 67.3,79.7 66.7,79.1 66.7,78.1 67.2,77.6 67.2,68.3 67.7,67.8 69.3,67.8 v1(69.4,67.9)
HEC_R4: IC5.3 IC15.9 TP8.1 | length 119.1
  Top Layer w0.3: v1(56.5,91) 55.9,90.4 55.9,88.1 57.65,86.35 IC15.9@57.65,84.575 ; v1(66,77.3) 65.6,76.9 65.6,64.8 67,63.4 97.6,63.4 102.59,58.41 102.59,41.1 105.79,37.9 105.79,26.5 106.395,25.895 IC5.3@108.665,25.895
  Mid-Layer 1 w0.3: v1(56.5,91) 56.7,91.2 64,91.2 64.8,90.4 65.7,89.5 65.7,85.7 64.8,84.8 64.8,78.5 v1(66,77.3)
HEC_R5: IC6.3 IC17.6 TP9.1 | length 110.3
  Top Layer w0.3: IC17.6@76,84.575 76,86.7 76.5,87.2 104.1,87.2 104.7,86.6 104.7,69.5 113,61.2 125.9,61.2 v1(126.5,61.8) ; v1@134.5,43 135.205,42.295 IC6.3@137.775,42.295 143.995,42.295 TP9.1@144,42.3
  Mid-Layer 1 w0.3: v1(126.5,61.8) 127.4,62.7 132.4,62.7 133.7,61.4 133.7,57.5 134.4,56.8 v1(134.4,43.2)
HEC_R6: IC8.3 IC17.7 TP11.1 | length 121.6
  Top Layer w0.3: IC17.7@75.35,84.575 75.35,87.35 76,88 104.9,88 105.3,87.6 105.3,71.1 105.3,70.6 106.3,69.6 v1(107,69.6) ; v1(110.1,52.6) 111.6,51.1 131.2,51.1 131.7,50.6 131.7,41 134.9,37.8 134.9,26.4 135.505,25.795 IC8.3@137.775,25.795
  Mid-Layer 1 w0.3: v1(107,69.6) 107,62.8 110.1,59.7 v1(110.1,52.6)
HEC_R7: IC7.3 IC17.8 TP10.1 | length 143.6
  Top Layer w0.3: IC17.8@74.7,84.575 74.7,87.7 75.5,88.5 105.3,88.5 106,87.8 106,73 108.5,70.5 108.5,66.8 113.4,61.9 124.1,61.9 125.7,63.5 135.8,63.5 139.5,59.8 TP10.1@165.4,59.8 167.1,58.1 167.1,43.2 166.195,42.295 IC7.3@159.365,42.295
HEC_R8: IC9.3 IC17.9 TP12.1 | length 149.8
  Top Layer w0.3: IC17.9@74.05,84.575 74.05,88.35 74.8,89.1 106,89.1 106.6,88.5 106.6,73.8 ; 106.6,76.1 106.6,73.8 ; v1(123.8,69) 123.8,72.2 123.2,72.8 107.6,72.8 106.6,73.8 ; v1(151.7,53.9) 153.3,52.3 153.29,52.3 153.29,41 156.49,37.8 156.49,26.4 157.095,25.795 IC9.3@159.365,25.795
  Bottom Layer w0.3: v1(123.8,69) 124.3,69 124.7,68.6 137.2,68.6 137.6,68.2 137.6,66.5 138.6,65.5 151,65.5 151.8,64.7 151.8,58.9 151,58.1 151,54.6 v1(151.7,53.9)
I2C_SCL: CN2.SCL IC18.7 IC19.8 R15.1 TP14.1 | length 235.6
  Top Layer w0.254: IC19.8@9.7,42.05 11.55,42.05 v1(12.1,42.6)
  Top Layer w0.3: CN2.SCL@15.7,104.22 30.12,104.22 31.4,105.5 31.4,116.2 32.3,117.1 104.2,117.1 104.9,116.4 104.9,100.7 105.5,100.1 120.2,100.1 121.95,101.85 R15.1@121.95,105.6 120.8,105.6 120.065,106.335 IC18.7@118.85,106.335
  Mid-Layer 1 w0.254: v1(12.1,42.6) 12.1,59.4 11,60.5 0.1,60.5 -0.9,61.5 -0.9,102.1 -0.6,102.4 6,102.4 7.2,103.6 11.5,103.6 12.7,102.4 ; 13.1,102.4 12.7,102.4 ; CN2.SCL@15.7,104.22 15.7,102.8 15.3,102.4 12.7,102.4
I2C_SDA: CN2.SDA IC18.1 IC19.7 R16.1 TP15.1 | length 216.1
  Top Layer w0.254: IC19.7@9.7,40.8 11.8,40.8 12.2,40.4 v1(12.2,40.2)
  Top Layer w0.3: CN2.SDA@13.16,104.22 13.16,105.56 14,106.4 29.2,106.4 30.2,107.4 30.2,117.3 30.8,117.9 109.7,117.9 110.15,117.45 R16.1@110.15,107.6 110.155,107.605 IC18.1@113.15,107.605
  Mid-Layer 1 w0.254: v1(12.2,40.2) 11.5,40.2 10.7,41 10.7,44.1 11.3,44.7 11.3,58.9 10.5,59.7 -0.4,59.7 -1.4,60.7 -1.4,103.3 -0.48,104.22 CN2.SDA@13.16,104.22
  other v1: 111.4,107.6
LIFT_UP1: CN2.T6 IC10_L1.1 | length 255.3
  Top Layer w0.3: v1(213.7,134.8) 213.7,135.75 IC10_L1.1@214.25,136.3
  Mid-Layer 1 w0.3: CN2.T6@13.16,91.52 13.2,91.56 13.2,94.7 13.6,95.1 17.9,95.1 18.6,95.8 18.6,127.9 19.9,129.2 186.8,129.2 195.1,120.9 212.8,120.9 213.7,121.8 v1(213.7,134.8)
LIFT_UP2: CN2.T20 IC10_L2.1 | length 266.7
  Top Layer w0.3: v1(213.7,109) 213.7,109.95 IC10_L2.1@214.25,110.5
  Mid-Layer 1 w0.3: CN2.T20@13.16,76.28 13.16,77.06 13.6,77.5 18.4,77.5 19.2,78.3 19.2,127.4 20.3,128.5 186,128.5 195,119.5 212.6,119.5 213.7,118.4 v1(213.7,109)
LIFT_UP3: CN2.T25 IC10_L3.1 | length 310.1
  Top Layer w0.3: v1(213.6,71.7) 213.6,72.65 IC10_L3.1@214.15,73.2
  Mid-Layer 1 w0.3: CN2.T25@15.7,71.2 19.7,71.2 20.4,71.9 20.4,126.3 21.3,127.2 183.5,127.2 185,125.7 185,97.8 188.1,94.7 211.9,94.7 218,88.6 218,79.7 213.6,75.3 v1(213.6,71.7)
LIFT_UP4: CN2.T32 IC10_L4.1 | length 356.2
  Top Layer w0.3: v1(213.61,46.08) 213.61,47.03 IC10_L4.1@214.16,47.58
  Mid-Layer 1 w0.3: CN2.T32@3,76.28 3,76.6 4,77.6 8.3,77.6 9.3,76.6 9.3,67.3 10.2,66.4 21.2,66.4 22,67.2 22,91.8 22.6,92.4 24,92.4 24.3,92.7 24.3,124.6 25,125.3 181.6,125.3 182.7,124.2 182.7,94.2 184.7,92.2 184.7,59.7 186.3,58.1 212.1,58.1 213.61,56.59 v1(213.61,46.08)
LIFT_UP5: CN2.T5 IC10_L5.1 | length 207.3
  Top Layer w0.3: v1(186.7,134.8) 186.7,135.75 IC10_L5.1@187.25,136.3
  Mid-Layer 1 w0.3: CN2.T5@15.7,96.6 17.4,96.6 18.1,97.3 18.1,128.2 19.7,129.8 182.8,129.8 186.7,133.7 v1(186.7,134.8)
LIFT_UP6: CN2.T24 IC10_L6.1 | length 248.5
  Top Layer w0.3: v1(186.8,109) 186.8,109.95 IC10_L6.1@187.35,110.5
  Mid-Layer 1 w0.3: CN2.T24@13.16,71.2 13.16,71.86 13.8,72.5 19.2,72.5 19.8,73.1 19.8,126.8 20.8,127.8 25.3,127.8 185.2,127.8 186.8,126.2 v1(186.8,109)
LIFT_UP7: CN2.T26 IC10_L7.1 | length 283.2
  Top Layer w0.3: v1(186.6,71.7) 186.6,72.65 IC10_L7.1@187.15,73.2
  Mid-Layer 1 w0.3: CN2.T26@13.16,68.66 14.4,69.9 20.1,69.9 21.2,71 21.2,106.6 21.4,106.8 23.3,106.8 23.6,107.1 23.6,125.9 24,126.3 182.6,126.3 183.7,125.2 183.7,95.8 186.6,92.9 v1(186.6,71.7)
LIFT_UP8: CN2.T33 IC10_L8.1 | length 325.9
  Top Layer w0.3: v1(186.61,46.08) 186.61,47.03 IC10_L8.1@187.16,47.58
  Mid-Layer 1 w0.3: CN2.T33@5.54,76.28 7.82,76.28 8.5,75.6 8.5,65.7 9.4,64.8 21.5,64.8 22.7,66 22.7,91.3 23,91.6 24.5,91.6 24.9,92 24.9,123.3 25.9,124.3 180.7,124.3 181.6,123.4 181.6,94.8 181.8,94.6 181.8,93.4 183.9,91.3 183.9,61.3 184,61.2 184,58.8 186.61,56.19 v1(186.61,46.08)
MA420IN1: CN8.2 IC11_M1.3 | length 70.7
  Mid-Layer 1 w0.5: IC11_M1.3@67.78,148 70.5,148 71.2,148.7 71.2,156.4 72.6,157.8 120.6,157.8 121.75,158.95 CN8.2@121.75,166.6
MA420IN2: CN8.4 IC11_M2.3 | length 51.9
  Mid-Layer 1 w0.5: IC11_M2.3@92.14,148.11 94.31,148.11 95.4,149.2 95.4,155.7 96.3,156.6 126.6,156.6 126.83,156.83 CN8.4@126.83,166.6
MA420IN3: CN9.2 IC11_M3.3 | length 49
  Mid-Layer 1 w0.5: IC11_M3.3@127.84,147.91 130.21,147.91 131.1,148.8 131.1,158.5 132.5,159.9 159.3,159.9 160.25,160.85 CN9.2@160.25,166.4
MA420IN4: CN9.4 IC11_M4.3 | length 27.5
  Mid-Layer 1 w0.5: IC11_M4.3@154.88,147.7 156.4,147.7 157.4,148.7 157.4,157.5 158.5,158.6 164.6,158.6 165.33,159.33 CN9.4@165.33,166.4
MLP_OUT1: C21_M1.1 CN2.A10 IC12_M1.3 R13_M1.1 R14_M1.2 TP13_M1.1 | length 124.5
  Top Layer w0.254: C21_M1.1@77.99,146.24 80.54,146.24 IC12_M1.3@80.59,146.29 80.64,146.34 R13_M1.1@80.64,147.99 82.64,147.99 R14_M1.2@82.69,148.04
  Mid-Layer 1 w0.3: CN2.A10@3,116.92 -1.12,116.92 -1.6,117.4 -1.6,147 -0.7,147.9 47.8,147.9 49.7,149.8 61.1,149.8 64,146.9 78.7,146.9 v1(79.4,146.2)
  other v1: 51.1,149.8
MLP_OUT2: C21_M2.1 CN2.A11 IC12_M2.3 R13_M2.1 R14_M2.2 TP13_M2.1 | length 149.9
  Top Layer w0.254: C21_M2.1@102.35,146.35 104.9,146.35 IC12_M2.3@104.95,146.4 105,146.45 R13_M2.1@105,148.1 107,148.1 R14_M2.2@107.05,148.15
  Mid-Layer 1 w0.3: CN2.A11@5.54,116.92 5.54,118.06 5,118.6 -0.5,118.6 -1,119.1 -1,146.5 -0.3,147.2 49.8,147.2 52.7,144.3 103.2,144.3 103.7,144.8 103.7,146.3 v1(103.6,146.3)
  other v1: 51.2,145.8
MLP_OUT3: C21_M3.1 CN2.A12 IC12_M3.3 R13_M3.1 R14_M3.2 TP13_M3.1 | length 187.3
  Top Layer w0.254: C21_M3.1@138.05,146.15 140.6,146.15 IC12_M3.3@140.65,146.2 140.7,146.25 R13_M3.1@140.7,147.9 142.7,147.9 R14_M3.2@142.75,147.95
  Top Layer w0.3: v1(1.1,145.2) -0.6,145.2 -1.2,144.6 -1.2,115.2 -0.38,114.38 CN2.A12@3,114.38
  Mid-Layer 1 w0.3: v1(1.1,145.2) 2.3,145.2 3.3,146.2 47,146.2 51.5,141.7 138.3,141.7 139.4,142.8 v1(139.4,146.2)
  other v1: 111,141.8
MLP_OUT4: C21_M4.1 CN2.A13 IC12_M4.3 R13_M4.1 R14_M4.2 TP13_M4.1 | length 219.8
  Top Layer w0.254: C21_M4.1@165.09,145.94 167.64,145.94 IC12_M4.3@167.69,145.99 167.74,146.04 R13_M4.1@167.74,147.69 169.74,147.69 R14_M4.2@169.79,147.74
  Mid-Layer 1 w0.3: CN2.A13@5.54,114.38 6.58,114.38 7.2,115 7.2,118.2 6.1,119.3 0.1,119.3 -0.4,119.8 -0.4,142.5 0.4,143.3 1.8,143.3 3.9,145.4 46.6,145.4 52.9,139.1 152.6,139.1 152.9,138.8 165.5,138.8 166.4,139.7 v1(166.4,145.9)
  other v1: 145.7,139.2
NetC1_2: C1.2 IC1.2 | length 3.5
  Top Layer w0.3: C1.2@161.85,100.7 161.85,102.05 162.375,102.575 IC1.2@163.775,102.575
NetC2_1: C2.1 IC1.4 | length 3.4
  Top Layer w0.3: IC1.4@163.775,103.875 167.125,103.875 C2.1@167.15,103.9
NetC2_2: C2.2 IC1.5 | length 5.6
  Top Layer w0.3: IC1.5@163.775,104.525 165.325,104.525 165.5,104.7 168.4,104.7 168.65,104.45 C2.2@168.65,103.9
NetC3_1: C3.1 IC1.1 | length 3.4
  Top Layer w0.3: IC1.1@163.775,101.925 167.075,101.925 C3.1@167.15,102
NetC3_2: C3.2 IC1.3 | length 5.7
  Top Layer w0.3: IC1.3@163.775,103.225 165.275,103.225 165.7,102.8 168.4,102.8 168.65,102.55 C3.2@168.65,102
NetC4_1: C4.1 IC1.6 | length 3.6
  Top Layer w0.3: IC1.6@163.775,105.175 165.275,105.175 165.8,105.7 C4.1@167.15,105.7
NetC26_1: C26.1 IC15.2 | length 5.1
  Top Layer w0.3: IC15.2@60.775,81.45 63.45,81.45 63.8,81.8 C26.1@63.8,83.75
NetC27_1: C27.1 IC15.4 | length 2.4
  Top Layer w0.3: IC15.4@60.775,82.75 62.05,82.75 62.3,83 C27.1@62.3,83.75
NetC29_1: C29.1 IC17.2 | length 6.1
  Top Layer w0.254: IC17.2@77.175,81.45 80.35,81.45 81,82.1 C29.1@81,84.15
NetC30_1: C30.1 IC17.4 | length 3.4
  Top Layer w0.254: IC17.4@77.175,82.75 79.05,82.75 79.3,83 C30.1@79.3,84.15
NetCN2_ID1: CN2.ID1 R4.1 | length 9.1
  Top Layer w0.254: CN2.ID1@13.16,116.92 13.16,118.16 13.6,118.6 18,118.6 18.4,118.2 R4.1@20.65,118.2
NetCN2_ID2: CN2.ID2 R3.1 | length 5.2
  Top Layer w0.254: CN2.ID2@15.7,116.92 18.18,116.92 18.9,116.2 R3.1@20.65,116.2
NetCN2_ID3: CN2.ID3 R2.1 | length 8.6
  Top Layer w0.254: CN2.ID3@13.16,114.38 14.44,113.1 17.5,113.1 18.7,114.3 R2.1@20.75,114.3
NetCN2_ID4: CN2.ID4 R1.1 | length 7.3
  Top Layer w0.254: CN2.ID4@15.7,109.3 17.7,109.3 18.2,109.8 18.2,111.5 19,112.3 R1.1@20.75,112.3
NetCN5_2: CN5.2 IC6.12 | length 44.1
  Top Layer w0.3: v1(126.2,45.6) 126.965,44.835 IC6.12@128.625,44.835 ; v1(129.9,37.9) 132.3,37.9 133.6,36.6 133.6,18.5 139.15,12.95 CN5.2@139.15,12.2
  Mid-Layer 1 w0.3: v1(126.2,45.6) 126.3,45.6 127.4,44.5 127.4,38.5 127.9,38 129.8,38 v1(129.9,37.9)
NetCN5_3: CN5.3 IC6.13 | length 42.5
  Top Layer w0.3: v1(125.9,43.6) 125.935,43.565 IC6.13@128.625,43.565 ; v1(126.1,37.2) 126,37.2 126.6,36.6 132.6,36.6 133,36.2 133,17 136.61,13.39 CN5.3@136.61,12.2
  Mid-Layer 1 w0.3: v1(125.9,43.6) 125.7,43.6 126.1,43.2 v1(126.1,37.2)
NetCN5_6: CN5.6 IC8.12 | length 23.3
  Top Layer w0.3: v1(124.9,29.1) 125.665,28.335 IC8.12@128.625,28.335 ; v1(127.6,20.2) 128.99,18.81 CN5.6@128.99,12.2
  Mid-Layer 1 w0.3: v1(124.9,29.1) 126,29.1 127,28.1 127,20.8 v1(127.6,20.2)
NetCN5_7: CN5.7 IC8.13 | length 19.3
  Top Layer w0.3: v1(124.9,27.1) 128.59,27.1 IC8.13@128.625,27.065 ; v1(125.3,20.4) 125.3,20.1 126.45,18.95 CN5.7@126.45,12.2
  Mid-Layer 1 w0.3: v1(124.9,27.1) 125.3,26.7 v1(125.3,20.4)
NetCN6_2: CN6.2 IC7.12 | length 44.7
  Top Layer w0.3: v1(147.3,45.4) 147.865,44.835 IC7.12@150.215,44.835 ; v1(149.1,37) 153,37 154.7,35.3 154.7,19.2 161.14,12.76 CN6.2@161.14,12.1
  Mid-Layer 1 w0.3: v1(147.3,45.4) 147.7,45.4 148.5,44.6 148.5,37.6 v1(149.1,37)
NetCN6_3: CN6.3 IC7.13 | length 42.2
  Top Layer w0.3: v1(147.3,36.5) 148,35.8 153,35.8 154.1,34.7 154.1,18.6 158.6,14.1 CN6.3@158.6,12.1 ; v1(147.4,43.5) 150.15,43.5 IC7.13@150.215,43.565
  Mid-Layer 1 w0.3: v1(147.3,36.5) 147.3,37.7 147.8,38.2 147.8,43.1 v1(147.4,43.5)
NetCN6_6: CN6.6 IC9.12 | length 22.7
  Top Layer w0.3: v1(146.8,28.8) 147.265,28.335 IC9.12@150.215,28.335 ; v1(149.3,21.5) 150.98,19.82 CN6.6@150.98,12.1
  Mid-Layer 1 w0.3: v1(146.8,28.8) 147.9,28.8 148.5,28.2 148.5,22.3 v1(149.3,21.5)
NetCN6_7: CN6.7 IC9.13 | length 18.9
  Top Layer w0.3: v1(146.8,26.8) 147.065,27.065 IC9.13@150.215,27.065 ; v1(147.2,21.6) 148.44,20.36 CN6.7@148.44,12.1
  Mid-Layer 1 w0.3: v1(146.8,26.8) 147.1,26.5 147.1,21.7 v1(147.2,21.6)
NetCN7_L1_2: CN7_L1.2 RLY1_L1.9 | length 6.6
  Top Layer w0.5: RLY1_L1.9@227.41,138.04 229.44,138.04 230.25,138.85 CN7_L1.2@233.7,138.85
NetCN7_L1_3: CN7_L1.3 RLY1_L1.8 | length 6.6
  Top Layer w0.5: RLY1_L1.8@227.41,135.5 229.2,135.5 230.01,136.31 CN7_L1.3@233.7,136.31
NetCN7_L1_4: CN7_L1.4 RLY1_L1.3 | length 14.6
  Bottom Layer w0.5: RLY1_L1.3@219.79,135.5 224.6,135.5 225.9,134.2 233.27,134.2 CN7_L1.4@233.7,133.77
NetCN7_L1_5: CN7_L1.5 RLY1_L1.7 | length 7
  Top Layer w0.5: RLY1_L1.7@227.41,132.96 228.94,132.96 230.67,131.23 CN7_L1.5@233.7,131.23
NetCN7_L1_6: CN7_L1.6 RLY1_L1.2 | length 23.5
  Top Layer w0.5: RLY1_L1.2@219.79,138.04 222.26,138.04 223.3,137 223.3,129 224.8,127.5 229,127.5 230.19,128.69 CN7_L1.6@233.7,128.69
NetCN7_L1_7: CN7_L1.7 RLY1_L1.4 | length 19.6
  Top Layer w0.5: RLY1_L1.4@219.79,132.96 221.74,132.96 222,132.7 222,127.8 223.65,126.15 CN7_L1.7@233.7,126.15